# EAGLE board headstage-mech (EAGLE 6.5.0)
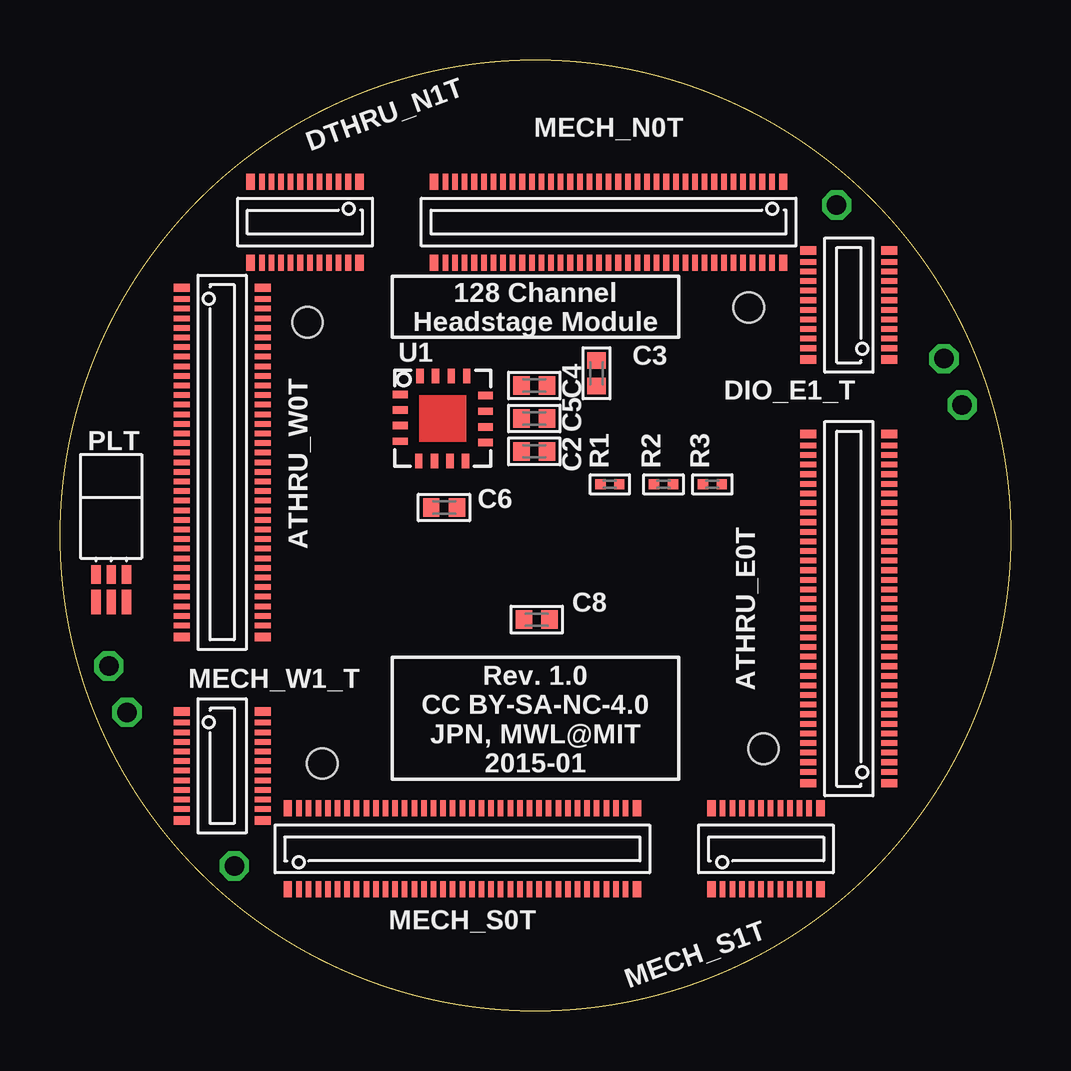
[diagram p0: board, top side]
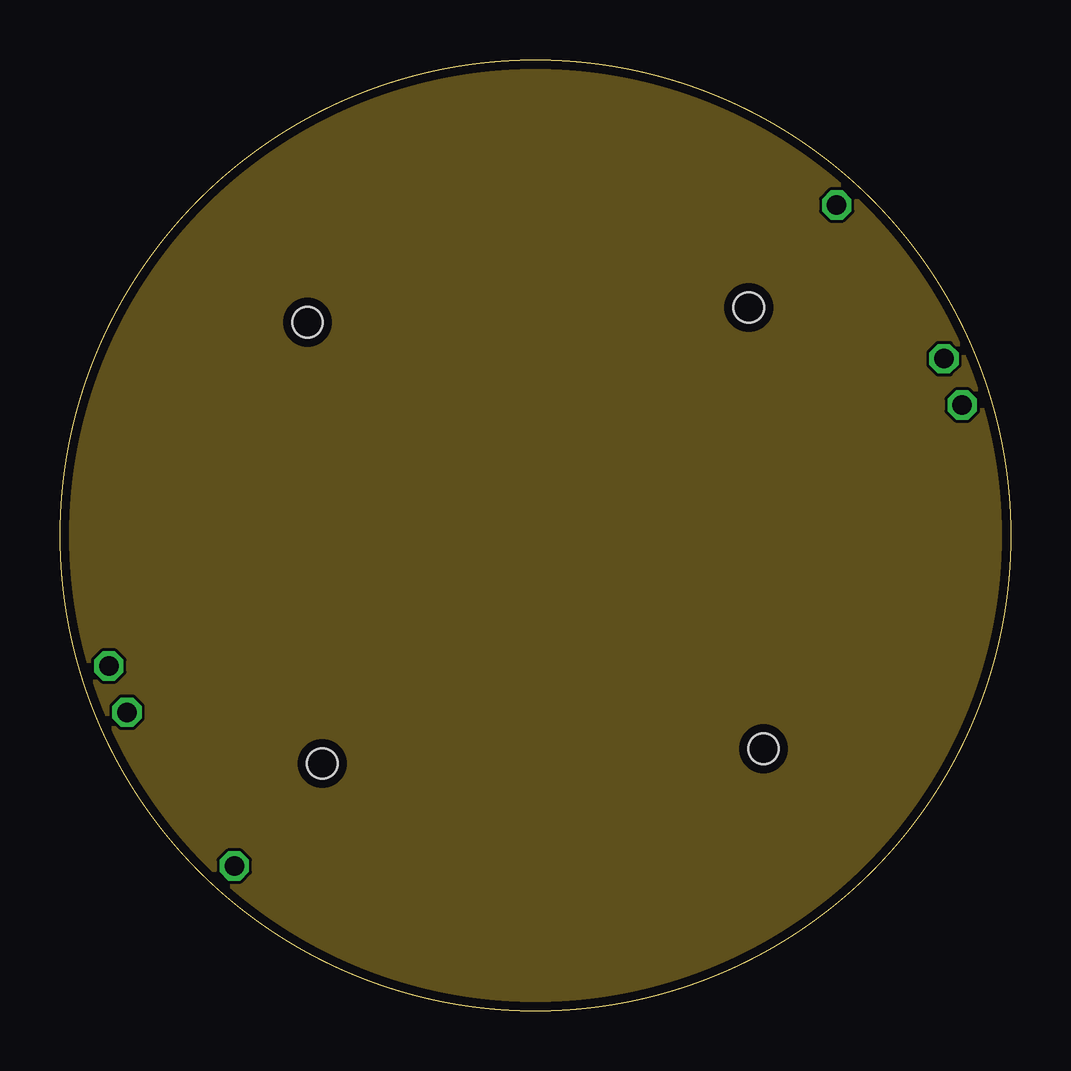
[diagram p1: board, inner layer Route2]
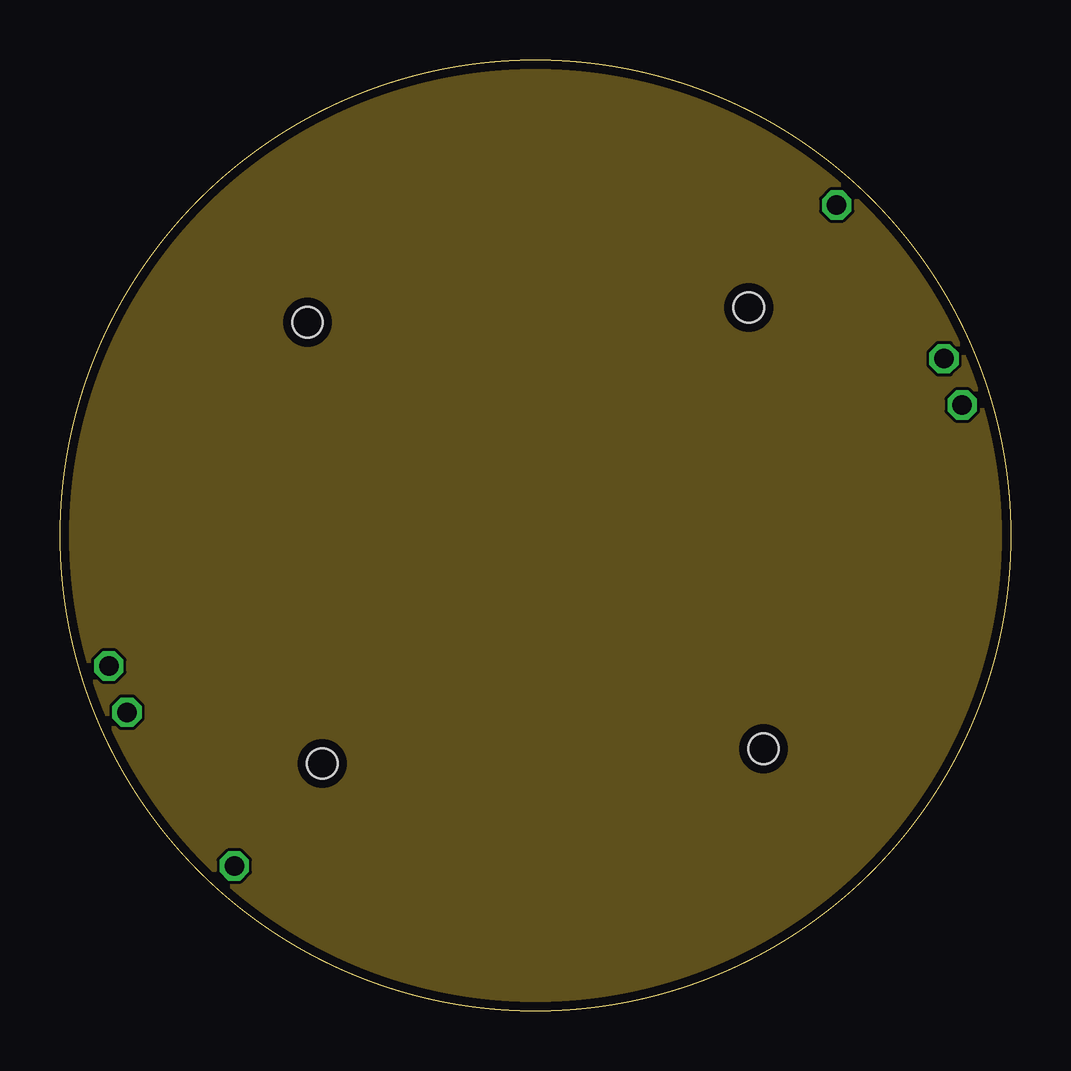
[diagram p2: board, inner layer Route15]
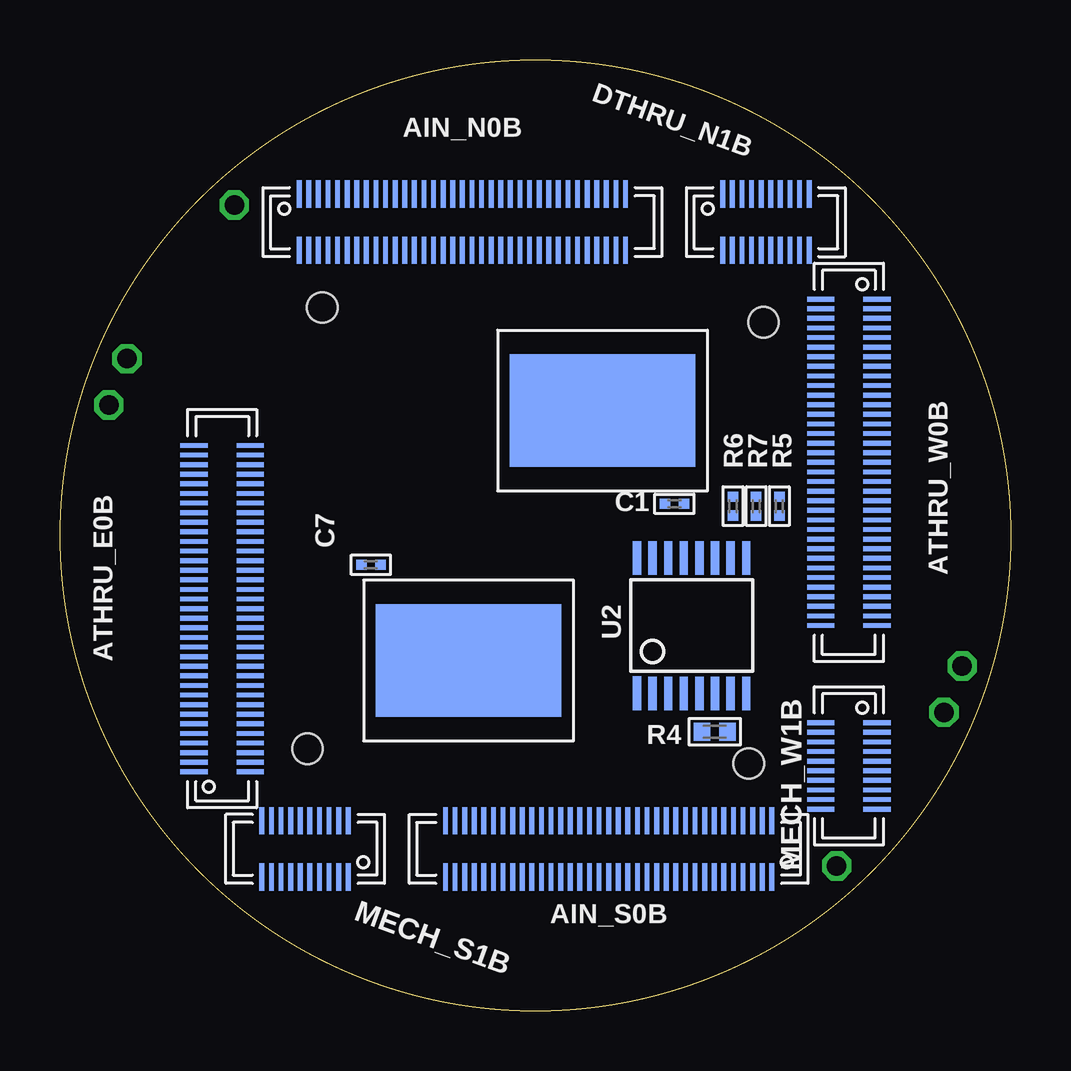
[diagram p3: board, bottom side, seen from below]

Size 39.62 x 39.62 mm. Coordinates in mm from the lower left corner, seen from the top.
Outline: circle at 19.81,19.81 radius 19.81
Copper layers (1*2*15*16): Top 0.035559375mm / dielectric 0.17018125mm / Route2 0.01778125mm / dielectric 47mil / Route15 0.01778125mm / dielectric 0.17018125mm / Bottom 0.035559375mm
Design rules "ohs-park-4-layer": minimum track width 5mil, minimum drill 10mil, track to track 5mil, track to pad 5mil, pad to pad 5mil, via to via 5mil, smd to smd 5mil, copper to edge 15mil, drill to drill 5mil, minimum pad ring 4mil, minimum via ring 4mil, stop-mask expansion 4mil, vias tented up to drill 100mil, thermal gap 10mil
Net classes: 1 thick: width 0.102 mm
Holes 1.27 mm at 10.31,28.7 28.7,29.31 29.31,10.92 10.92,10.31

## Footprints (pad centres in the part's own frame; a part is rotated, then mirrored left to right if it is on the bottom)
DF40-70REC = smd 0.2 x 1.14: 1 -6.8,1.17; 2 -6.4,1.17; 3 -6,1.17; 4 -5.6,1.17; 5 -5.2,1.17; 6 -4.8,1.17; 7 -4.4,1.17; 8 -4,1.17; 9 -3.6,1.17; 10 -3.2,1.17; 11 -2.8,1.17; 12 -2.4,1.17; 13 -2,1.17; 14 -1.6,1.17; 15 -1.2,1.17; 16 -0.8,1.17; 17 -0.4,1.17; 18 0,1.17; 19 0.4,1.17; 20 0.8,1.17; 21 1.2,1.17; 22 1.6,1.17; 23 2,1.17; 24 2.4,1.17; 25 2.8,1.17; 26 3.2,1.17; 27 3.6,1.17; 28 4,1.17; 29 4.4,1.17; 30 4.8,1.17; 31 5.2,1.17; 32 5.6,1.17; 33 6,1.17; 34 6.4,1.17; 35 6.8,1.17; 36 6.8,-1.17; 37 6.4,-1.17; 38 6,-1.17; 39 5.6,-1.17; 40 5.2,-1.17; 41 4.8,-1.17; 42 4.4,-1.17; 43 4,-1.17; 44 3.6,-1.17; 45 3.2,-1.17; 46 2.8,-1.17; 47 2.4,-1.17; 48 2,-1.17; 49 1.6,-1.17; 50 1.2,-1.17; 51 0.8,-1.17; 52 0.4,-1.17; 53 0,-1.17; 54 -0.4,-1.17; 55 -0.8,-1.17; 56 -1.2,-1.17; 57 -1.6,-1.17; 58 -2,-1.17; 59 -2.4,-1.17; 60 -2.8,-1.17; 61 -3.2,-1.17; 62 -3.6,-1.17; 63 -4,-1.17; 64 -4.4,-1.17; 65 -4.8,-1.17; 66 -5.2,-1.17; 67 -5.6,-1.17; 68 -6,-1.17; 69 -6.4,-1.17; 70 -6.8,-1.17
DF40-70HEAD = smd 0.23 x 0.66: 1 -6.8,-1.685; 2 -6.4,-1.685; 3 -6,-1.685; 4 -5.6,-1.685; 5 -5.2,-1.685; 6 -4.8,-1.685; 7 -4.4,-1.685; 8 -4,-1.685; 9 -3.6,-1.685; 10 -3.2,-1.685; 11 -2.8,-1.685; 12 -2.4,-1.685; 13 -2,-1.685; 14 -1.6,-1.685; 15 -1.2,-1.685; 16 -0.8,-1.685; 17 -0.4,-1.685; 18 0,-1.685; 19 0.4,-1.685; 20 0.8,-1.685; 21 1.2,-1.685; 22 1.6,-1.685; 23 2,-1.685; 24 2.4,-1.685; 25 2.8,-1.685; 26 3.2,-1.685; 27 3.6,-1.685; 28 4,-1.685; 29 4.4,-1.685; 30 4.8,-1.685; 31 5.2,-1.685; 32 5.6,-1.685; 33 6,-1.685; 34 6.4,-1.685; 35 6.8,-1.685; 36 6.8,1.685; 37 6.4,1.685; 38 6,1.685; 39 5.6,1.685; 40 5.2,1.685; 41 4.8,1.685; 42 4.4,1.685; 43 4,1.685; 44 3.6,1.685; 45 3.2,1.685; 46 2.8,1.685; 47 2.4,1.685; 48 2,1.685; 49 1.6,1.685; 50 1.2,1.685; 51 0.8,1.685; 52 0.4,1.685; 53 0,1.685; 54 -0.4,1.685; 55 -0.8,1.685; 56 -1.2,1.685; 57 -1.6,1.685; 58 -2,1.685; 59 -2.4,1.685; 60 -2.8,1.685; 61 -3.2,1.685; 62 -3.6,1.685; 63 -4,1.685; 64 -4.4,1.685; 65 -4.8,1.685; 66 -5.2,1.685; 67 -5.6,1.685; 68 -6,1.685; 69 -6.4,1.685; 70 -6.8,1.685 | smd 0.35 x 0.66: M1 -7.275,-1.685; M2 7.275,-1.685; M3 7.275,1.685; M4 -7.275,1.685
0201 = smd 0.432 x 0.432: 1 -0.394,0; 2 0.394,0
0402 = smd 0.686 x 0.762: 1 -0.533,0; 2 0.533,0
DF40-20HEAD = smd 0.23 x 0.66: 1 -1.8,-1.685; 2 -1.4,-1.685; 3 -1,-1.685; 4 -0.6,-1.685; 5 -0.2,-1.685; 6 0.2,-1.685; 7 0.6,-1.685; 8 1,-1.685; 9 1.4,-1.685; 10 1.8,-1.685; 11 1.8,1.685; 12 1.4,1.685; 13 1,1.685; 14 0.6,1.685; 15 0.2,1.685; 16 -0.2,1.685; 17 -0.6,1.685; 18 -1,1.685; 19 -1.4,1.685; 20 -1.8,1.685 | smd 0.35 x 0.66: M1 -2.275,-1.685; M2 2.275,-1.685; M3 2.275,1.685; M4 -2.275,1.685
DF40-20REC = smd 0.2 x 1.14: 1 -1.8,1.17; 2 -1.4,1.17; 3 -1,1.17; 4 -0.6,1.17; 5 -0.2,1.17; 6 0.2,1.17; 7 0.6,1.17; 8 1,1.17; 9 1.4,1.17; 10 1.8,1.17; 11 1.8,-1.17; 12 1.4,-1.17; 13 1,-1.17; 14 0.6,-1.17; 15 0.2,-1.17; 16 -0.2,-1.17; 17 -0.6,-1.17; 18 -1,-1.17; 19 -1.4,-1.17; 20 -1.8,-1.17
RHD2164_COB_MECH = smd 7.722 x 4.674: CENTER 0,0
TESTPOINT_SMALL = drill 0.813 octagon: 1 0,0
OMNETICS_PZN-06-AA = smd 0.381 x 0.762: B1 0.635,-1.016; B2 0,-1.016; B3 -0.635,-1.016 | smd 0.381 x 1.016: T1 0.635,-2.159; T2 0,-2.159; T3 -0.635,-2.159
ADXL335 = smd 0.61 x 0.305: COM1 -1.775,-0.3; NC1 -1.775,1; NC2 -1.775,-0.95; NC3 1.775,-1; NC4 1.775,0.3; ST -1.775,0.35; XOUT 1.775,0.95; YOUT 1.775,-0.35 | smd 0.305 x 0.61: COM2 -1,-1.775; COM3 -0.35,-1.775; COM4 0.3,-1.775; NC5 1,1.775; NC6 -0.95,1.775; VS1 0.35,1.775; VS2 -0.3,1.775; ZOUT 0.95,-1.775
TSSOP-16 = smd 0.348 x 1.397: 1 -2.273,-2.814; 2 -1.623,-2.815; 3 -0.973,-2.815; 4 -0.323,-2.815; 5 0.327,-2.815; 6 0.977,-2.815; 7 1.627,-2.815; 8 2.277,-2.815; 9 2.277,2.825; 10 1.627,2.825; 11 0.977,2.825; 12 0.327,2.825; 13 -0.323,2.825; 14 -0.973,2.825; 15 -1.623,2.825; 16 -2.273,2.825

## Placement (x,y rotation side)
AIN_N0B  DF40REC  [DF40-70REC]  22.86,32.87 0 bottom
AIN_S0B  DF40REC  [DF40-70REC]  16.76,6.76 180 bottom
ATHRU_E0B  DF40REC  [DF40-70REC]  32.87,16.76 90 bottom
ATHRU_E0T  DF40HEAD  [DF40-70HEAD]  32.87,16.76 90 top
ATHRU_W0B  DF40REC  [DF40-70REC]  6.76,22.86 270 bottom
ATHRU_W0T  DF40HEAD  [DF40-70HEAD]  6.76,22.86 270 top
C1  10n  [0201]  14.02,21.13 0 bottom
C2  .1uF  [0402]  19.76,23.32 0 top
C3  .1uF  [0402]  22.35,26.57 270 top
C4  .1uF  [0402]  19.76,26.06 180 top
C5  .1uF  [0402]  19.76,24.69 180 top
C6  .1uF  [0402]  16,20.98 0 top
C7  10n  [0201]  26.67,18.59 180 bottom
C8  .1uF  [0402]  19.86,16.31 180 top
DIO_E1_T  DF40HEAD  [DF40-20HEAD]  32.87,29.41 90 top
DTHRU_N1B  DF40REC  [DF40-20REC]  10.21,32.87 0 bottom
DTHRU_N1T  DF40HEAD  [DF40-20HEAD]  10.21,32.87 180 top
E$1  [RHD2164_COB_MECH]  22.61,14.61 0 bottom
E$2  [RHD2164_COB_MECH]  17.02,25.02 0 bottom
GND  GND  [TESTPOINT_SMALL]  36.83,27.18 0 top
GND.  GND  [TESTPOINT_SMALL]  2.79,12.45 0 top
MECH_N0T  DF40HEAD  [DF40-70HEAD]  22.86,32.87 180 top
MECH_S0T  DF40HEAD  [DF40-70HEAD]  16.76,6.76 0 top
MECH_S1B  DF40REC  [DF40-20REC]  29.41,6.76 180 bottom
MECH_S1T  DF40HEAD  [DF40-20HEAD]  29.41,6.76 0 top
MECH_W1_T  DF40HEAD  [DF40-20HEAD]  6.76,10.21 270 top
MECH_W1B  DF40REC  [DF40-20REC]  6.76,10.21 270 bottom
PLT  PZN-06  [OMNETICS_PZN-06-AA]  2.13,19.2 0 top
R1  100  [0201]  22.91,21.95 0 top
R2  100  [0201]  25.15,21.95 0 top
R3  100  [0201]  27.18,21.95 0 top
R4  0  [0402]  12.34,11.63 180 bottom
R5  100k  [0201]  9.65,21.03 270 bottom
R6  100k  [0201]  10.62,21.03 270 bottom
R7  100k  [0201]  11.58,21.03 270 bottom
REF1  REF  [TESTPOINT_SMALL]  7.26,6.05 0 top
REF2  REF  [TESTPOINT_SMALL]  32.36,33.58 0 top
U1  ADXL335  [ADXL335]  15.95,24.69 0 top
U2  74HC4053  [TSSOP-16]  13.31,16.05 0 bottom
VCC1  VCC  [TESTPOINT_SMALL]  37.59,25.25 0 top
VCC2  VCC  [TESTPOINT_SMALL]  2.03,14.38 0 top

## Library data of the parts
AIN_N0B AIN_S0B ATHRU_E0B ATHRU_E0T ATHRU_W0B ATHRU_W0T C4-C6 DIO_E1_T DTHRU_N1B DTHRU_N1T E$1 E$2 GND GND. MECH_N0T MECH_S0T MECH_S1B MECH_S1T MECH_W1_T MECH_W1B PLT R1-R3 REF1 REF2 U1 U2 VCC1 VCC2 = jonnew
C1 C2 C7 C8 R4-R7 = RHD2000_eval_board
C3 = headstage

## Nets
S$7 [thick]: U2.8
S$10 [thick]: U2.16

## Tracks (layer width: path | path; a pad name or v marks a point on that pad's centre or on a via)
GND
  pour Route2 (no thermals): 0,19.81 arc-90 19.81,39.62 arc-90 39.62,19.81 arc-90 19.81,0 arc-90
VCC
  pour Route15 (no thermals): 0,19.81 arc-90 19.81,39.62 arc-90 39.62,19.81 arc-90 19.81,0 arc-90

## Text on the board
tPlace: 128 Channel / Headstage Module | Rev. 1.0 / CC BY-SA-NC-4.0 / JPN, MWL@MIT / 2015-01